# EAGLE board pyro_driver (EAGLE 9.6.2)

Size 160 x 100 mm. Coordinates in mm from the lower left corner, seen from the top.
Outline: 0,0 160,0 160,100 0,100 0,0
Copper layers (1*16): Top 0.035mm / dielectric 1.5mm / Bottom 0.035mm
Design rules "default": minimum track width 6mil, minimum drill 0.35mm, track to track 6mil, track to pad 6mil, pad to pad 6mil, via to via 6mil, smd to smd 6mil, copper to edge 40mil, drill to drill 6mil, minimum pad ring 10mil, minimum via ring 8mil, stop-mask expansion 4mil, vias tented up to drill 0mil, thermal gap 10mil

## Footprints (pad centres in the part's own frame; a part is rotated, then mirrored left to right if it is on the bottom)
VISHAY_SI7232DN-T1-GE3_0 = smd 0.991 x 0.406: 1 -1.435,0.991; 2 -1.435,0.33; 3 -1.435,-0.33; 4 -1.435,-0.991 | smd 0.87 x 0.87: 5-6 -1.39,-0.634; 7-8 0.781,0.634
R0603 = smd 1 x 1.1: 1 -0.85,0; 2 0.85,0
MA04-1 = drill 1.016 long: 1 -3.81,0; 2 -1.27,0; 3 1.27,0; 4 3.81,0

## Placement (x,y rotation side)
Q1  VISHAY_SI7232DN-T1-GE3VISHAY_SI7232DN-T1-GE3_0_0  [VISHAY_SI7232DN-T1-GE3_0]  17.78,40.64 0 top
R1  3.3k  [R0603]  43.18,52.07 0 top
R2  3.3k  [R0603]  30.48,59.69 0 top
R3  120k  [R0603]  43.18,46.99 0 top
R4  120k  [R0603]  35.56,43.18 0 top
R5  22k  [R0603]  25.4,55.88 0 top
R6  22k  [R0603]  43.18,57.15 0 top
SV1  [MA04-1]  27.94,26.67 0 top

## Library data of the parts
Q1 = Vishay - SI7232DN-T1-GE3; AUTOMOTIVE: No; CENTROID_NOT_SPECIFIED: No; CONTINUOUS_DRAIN_CURRENT: 10A; DATASHEET: http://www.vishay.com/docs/68986/si7232dn.pdf; DEPLETION_MODE: False; DEVICE_CLASS_L1: Discrete Semiconductors; DEVICE_CLASS_L2: Transistors; DEVICE_CLASS_L3: MOSFETs; DIGIKEY_DESCRIPTION: MOSFET 2N-CH 20V 25A PPAK 1212-8; DIGIKEY_PART_NUMBER: SI7232DN-T1-GE3CT-ND; DRAIN_TO_SOURCE_BREAKDOWN_VOLTAGE: 20V; DRAIN_TO_SOURCE_RESISTANCE: 0.0135Ω; DRAIN_TO_SOURCE_VOLTAGE: 20V; FOOTPRINT_VARIANT_NAME_0: Recommended_Land_Pattern; GATE_CHARGE_AT_VGS: 21nC @ 8V; GATE_TO_SOURCE_VOLTAGE: 8V; HEIGHT: 1.17mm; INPUT_CAPACITACE_AT_VDS: 1220pF @ 10V; LEAD_FREE: Yes; MAX_FORWARD_DIODE_VOLTAGE: 1.2V; MAX_JUNCTION_TEMP: +150°C; MF: Vishay; MFG_PACKAGE_IDENT: S16-2667-DUAL; MFG_PACKAGE_IDENT_DATE: 01/2017; MFG_PACKAGE_IDENT_REV: M; MOUSER_DESCRIPTION: MOSFET 20V 25A 23W 16.4mohm @ 4.5V; MOUSER_PART_NUMBER: 781-SI7232DN-GE3; MPN: SI7232DN-T1-GE3; NUMBER_OF_CHANNELS: 2; NUMBER_OF_N_CHANNELS: 2; PACKAGE: PowerPAK® 1212-8 Dual; POWER_DISSIPATION: 2.6W; PREFIX: Q; PULSE_DRAIN_CURRENT: 40A; REVERSE_RECOVERY_CHARGE: 15nC; REVERSE_RECOVERY_TIME: 20ns; ROHS: Yes; RTHJA_MAX: 38°C/W; STANDOFF_HEIGHT: 0mm; TEMPERATURE_RANGE_HIGH: +150°C; TEMPERATURE_RANGE_LOW: -55°C; THRESHOLD_VGS_MAX: 1V; THRESHOLD_VGS_MIN: 0.4V; TRANSCONDUCTANCE: 47S; TURN_OFF_DELAY_TIME: 35ns; TURN_ON_DELAY_TIME: 10ns; TYP_FORWARD_DIODE_VOLTAGE: 0.81V; VERIFICATION_VERSION: 0.0.0.3
R1-R6 = rcl; SPICEPREFIX: R
SV1 = con-lstb; OC_FARNELL: unknown; OC_NEWARK: unknown

## Nets
0: Q1.1 Q1.3 R1.1 R2.1 R5.1 R6.1
FET_A: Q1.7-8 R4.1 SV1.4
FET_B: Q1.5-6 R3.1 SV1.2
FIRE_A: Q1.2 R1.2
FIRE_B: Q1.4 R2.2
SENSE_FET_A: R4.2 R5.2
SENSE_FET_B: R3.2 R6.2
VDD: SV1.1 SV1.3

## Tracks (layer width: path | path; a pad name or v marks a point on that pad's centre or on a via)
0  (5 unrouted)
FET_A  (2 unrouted)
FET_B  (2 unrouted)
FIRE_A  (1 unrouted)
FIRE_B  (1 unrouted)
SENSE_FET_A  (1 unrouted)
SENSE_FET_B  (1 unrouted)
VDD  (1 unrouted)